# Altium PCB motherboard.PcbDoc
Units mil, origin at the board's own origin, x right, y up, seen from the top; angles counter-clockwise.
Board outline 3000 x 3500 mil, 2 copper layers (Top Layer, Bottom Layer), stack 62.8 mil thick; 55 components, 56 nets, 253 pads, 82 vias.
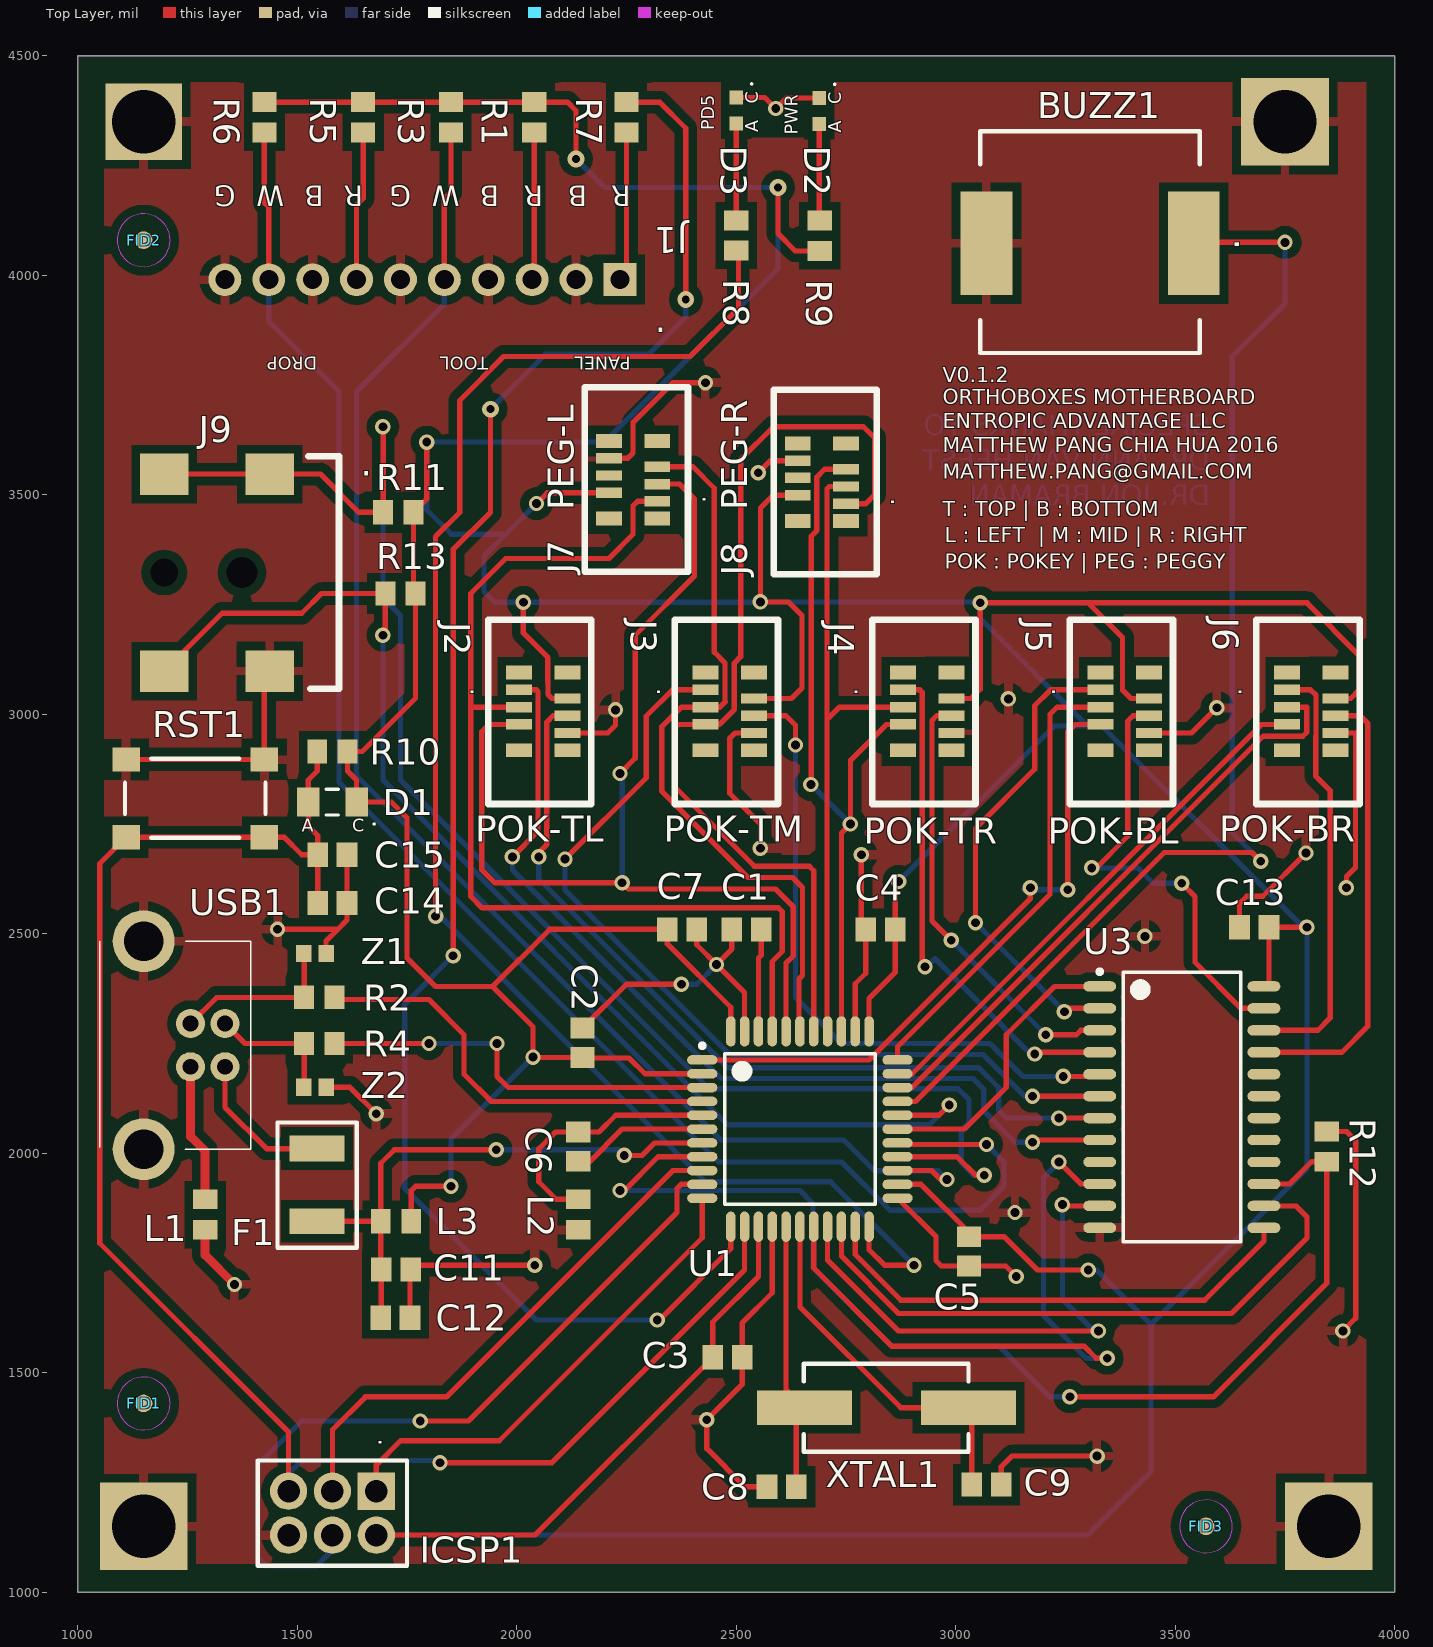
[diagram p0: Top Layer view]
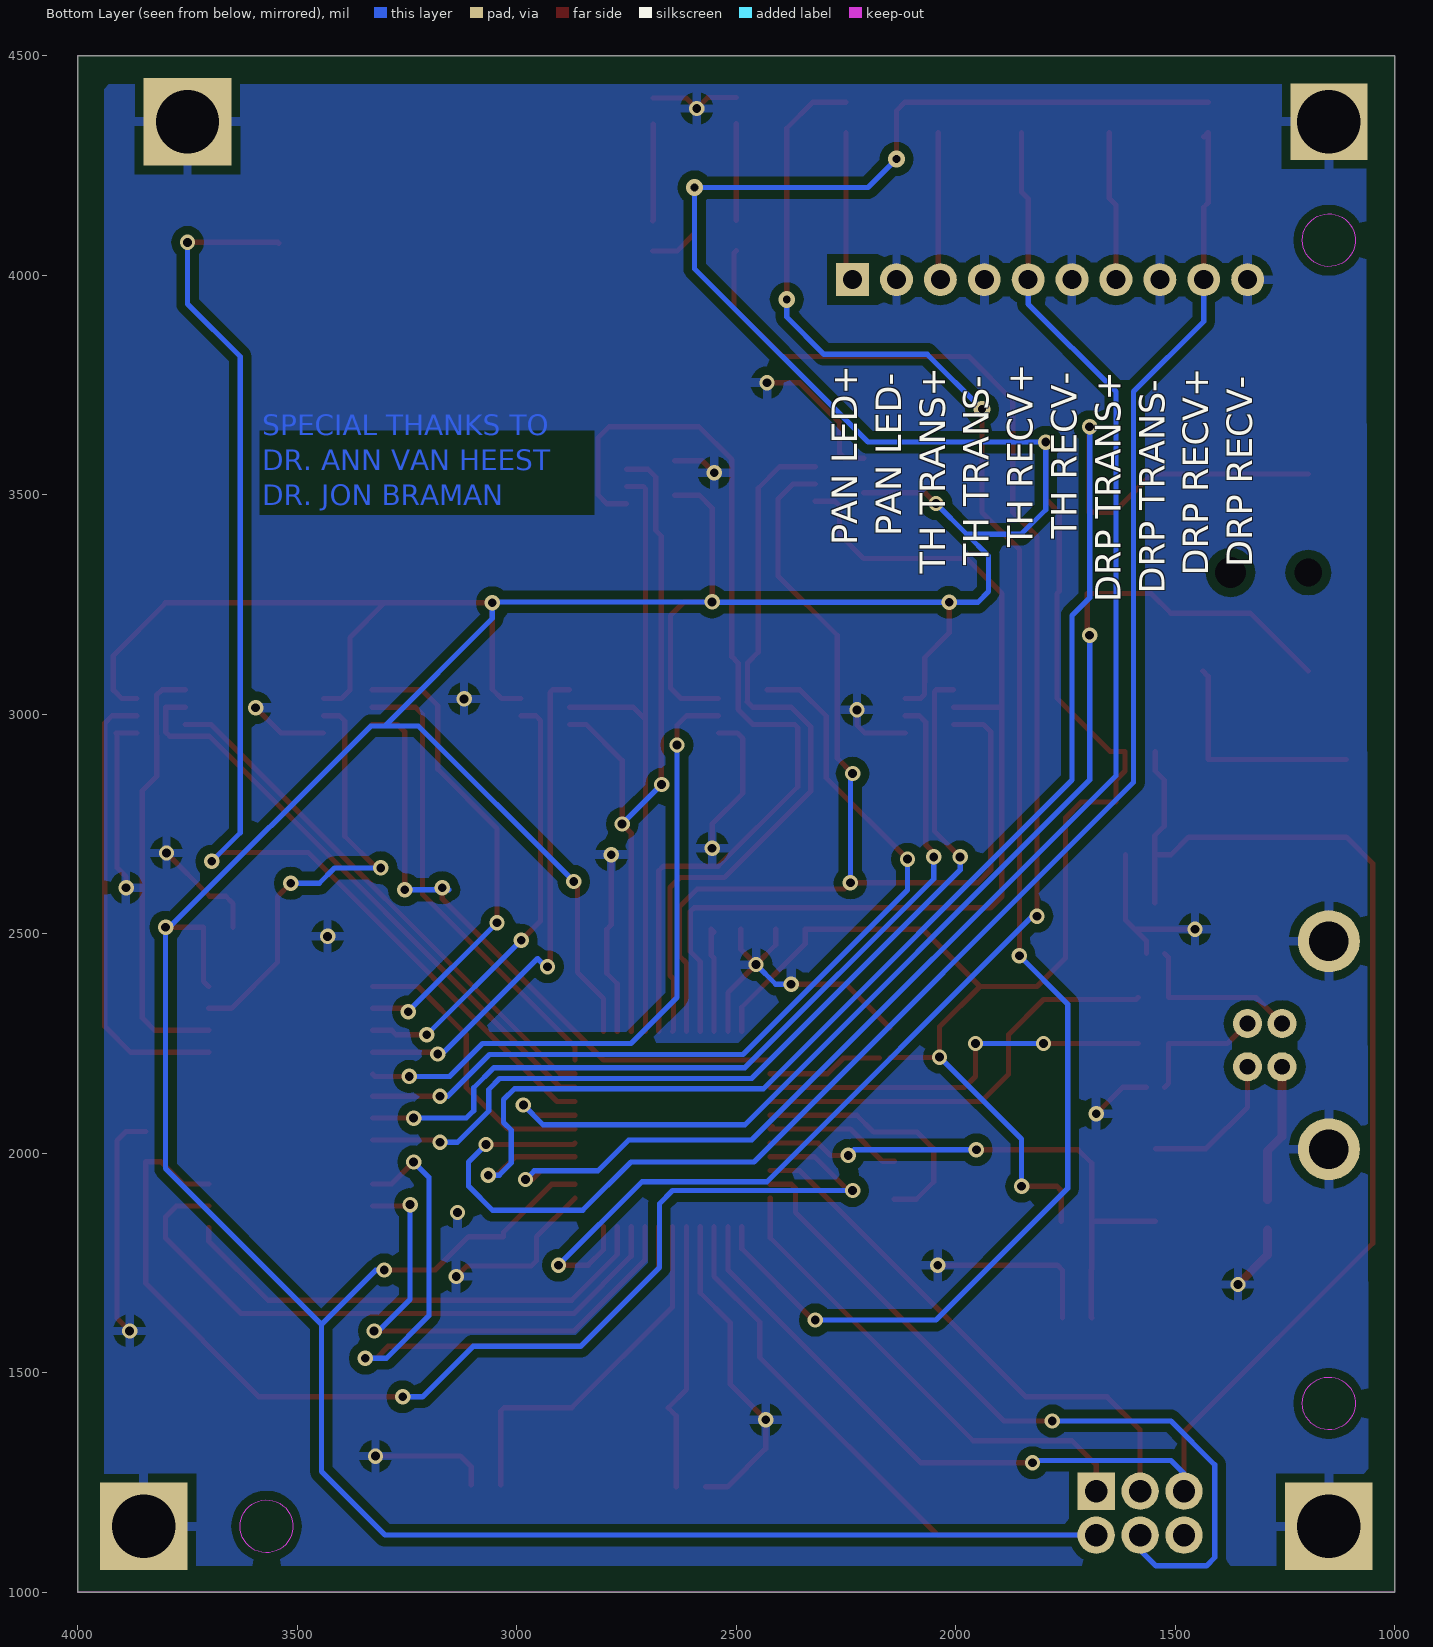
[diagram p1: Bottom Layer view, seen from below]
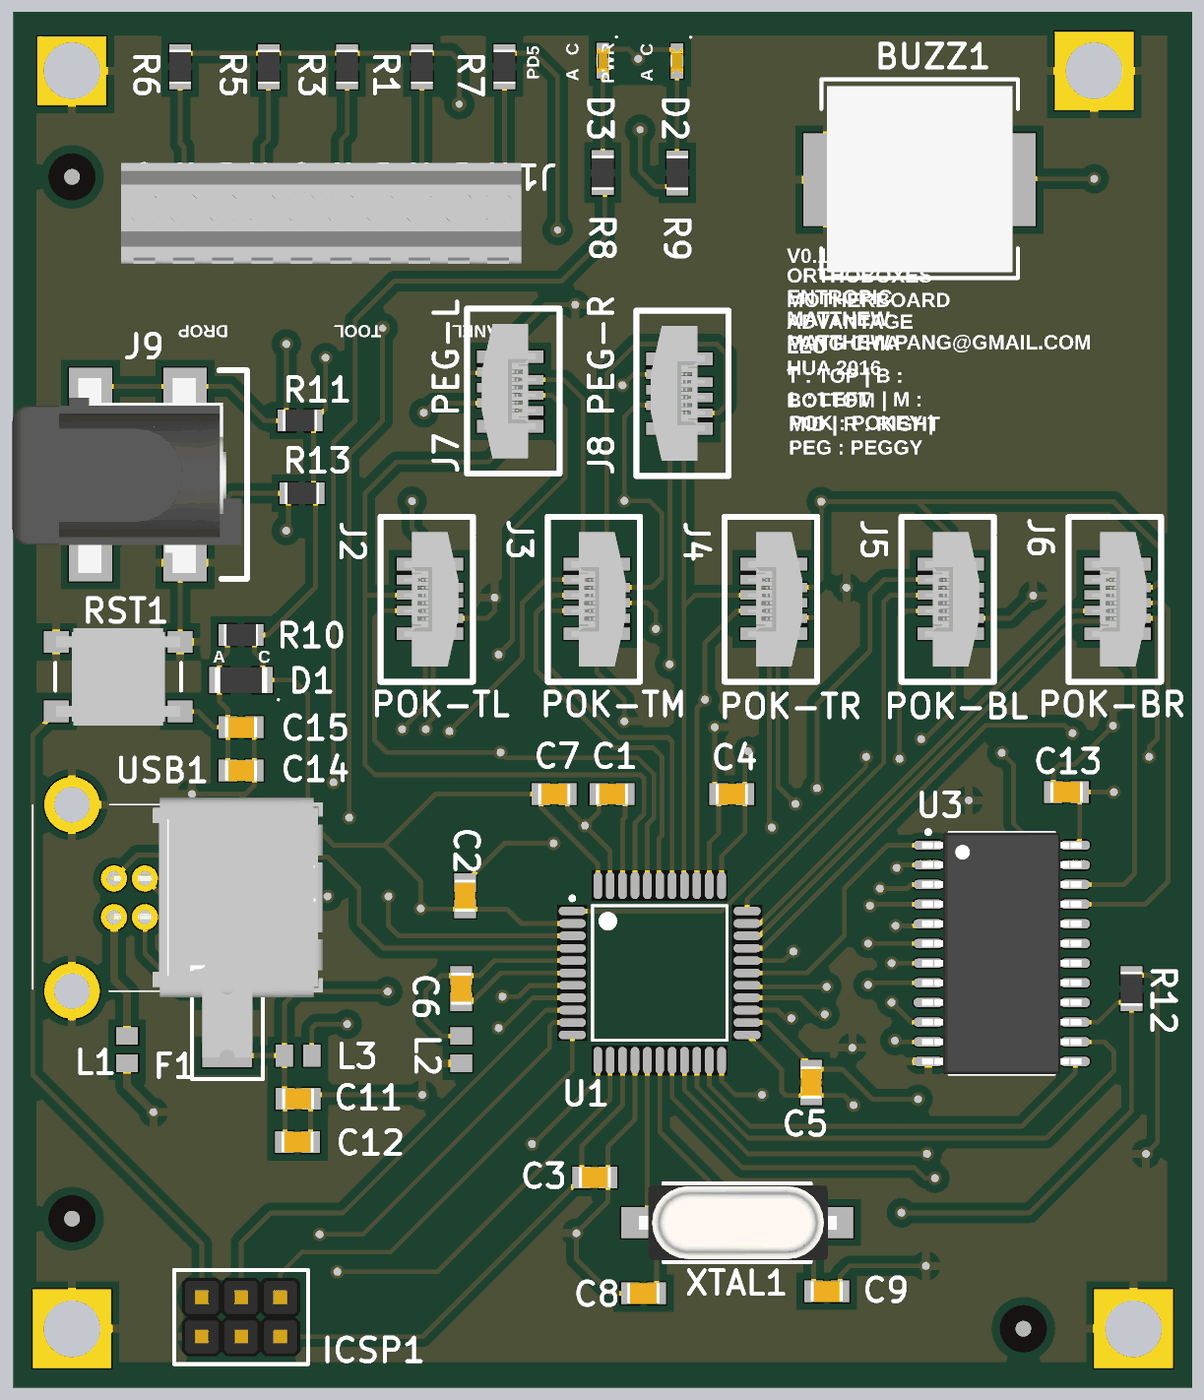
[diagram p2: 3D render of the assembled board from above, using the file's embedded part models]

## Layer stack, top to bottom
Top Solder: solder mask 1, Solder Resist, Dk 3.5
Top Layer: signal copper 1.4
Dielectric 1: dielectric 60, FR-4, Dk 4.6
Bottom Layer: signal copper 1.4
Bottom Solder: solder mask 1, Solder Resist, Dk 3.5

## Board outline
1000,1000 4000,1000 4000,4500 1000,4500

## Design rules (kind name [scope] priority, off if disabled: settings)
BoardOutlineClearance [All] p1: gap=30
Clearance [All] p1: gap=6 except(7: SMDPad-SMDPad; 8: Arc-SMDPad Track-Track Track-SMDPad; 10: SMDPad-Via THPad-Via Via-Via; 20: Arc-Poly Track-Poly SMDPad-Poly THPad-Poly Via-Poly Fill-Poly Poly-Poly)
ComponentClearance [All] p1: gap=50 collisioncheckmode=3 verticalgap=100 showdistances=TRUE
DiffPairsRouting [All] p1: maxlimit=10 minlimit=10 mostfreqgap=10 toplayer_minwidth=8 toplayer_maxwidth=15 toplayer_prefwidth=8 bottomlayer_minwidth=8 bottomlayer_maxwidth=15 bottomlayer_prefwidth=8 maxuncoupledlength=500
HoleSize [All] p1: absolutevalues=TRUE maxlimit=265 minlimit=13 maxpercent=80.000 minpercent=20.000
MinimumAnnularRing [All] p1: minimumring=7
MinimumSolderMaskSliver [All] p1: minsoldermaskwidth=4
PlaneClearance [All] p1: clearance=30
PlaneConnect [All] p1: planeconnectstyle=Relief reliefexpansion=20 reliefentries=4 reliefconductorwidth=20 reliefairgap=10
PolygonConnect [All] p1: connectstyle=Relief reliefconductorwidth=20 reliefentries=4 polygonreliefangle="90 Angle" airgapwidth=20
RoutingVias [All] p1: holewidth=18 width=38 viastyle="Through Hole" minholewidth=10 minwidth=15 maxholewidth=40 maxwidth=50
SilkToSilkClearance [All] p1: silktosilkclearance=4
SilkToSolderMaskClearance [IsPad] p1: minsilkscreentomaskgap=5 clearancetoexposedcopper=TRUE
SolderMaskExpansion [All] p1: expansion=4
Width [InNetClass('All Nets')] p1: maxlimit=30 minlimit=6 preferedwidth=6 minimp=50.000000 maximp=50.000000 favimp=50.000000
22 further rules are at their usual default settings.

## Classes and differential pairs
differential pair USBD: +USBD_P -USBD_N
differential pair USB: +USB_P -USB_N

## Components (designator, comment, footprint, x,y, rotation, side; value= is the part's Value field where it differs from the comment)
BUZZ1 "CMT-1203-SMT-TR" BUZZER 3306,4073 r270 top
C1 "100nF" CAPC2012X09N 2523.46,2510 r0 top
C2 "100nF" CAPC2012X09N 2150,2251.54 r270 top
C3 "100nF" CAPC2012X09N 2480,1535 r0 top
C4 "100nF" CAPC2012X09N 2828.46,2510 r180 top
C5 "100nF" CAPC2012X09N 3030,1776.54 r270 top
C6 "1uF" CAPC2012X14N 2140,2015 r270 top
C7 "100nF" CAPC2012X09N 2376.54,2510 r0 top
C8 "CAP 18pF" CAPC2012X08N 2603.46,1240 r0 top
C9 "CAP 18pF" CAPC2012X08N 3070,1245 r180 top
C11 "10uF" CAPC2012X14N 1725,1735 r180 top
C12 "100nF" CAPC2012X09N 1723.46,1625 r180 top
C13 "100nF" CAPC2012X09N 3680,2515 r0 top
C14 "100nF" CAPC2012X09N 1580,2570 r180 top
C15 "100nF" CAPC2012X09N 1580,2680 r180 top
D1 "Diode 100V 150mA" DIOC3215X09N 1580,2800 r0 top
D2 "PWR" 0603LED 2689,4344.94 r90 top
D3 "PD5" 0603LED 2500,4345.94 r90 top (schematic designator D1)
F1 "MF-MSMF050" "FUSE MF-MSMF050" 1545,1845 r90 top
FID1 "FIDUCIAL" FID 1150,1430 r0 top
FID2 "FIDUCIAL" FID 1150,4080 r90 top
FID3 "FIDUCIAL" FID 3570,1150 r90 top
ICSP1 "67997-206HLF" "3X2 PIN HEADER" 1680,1230 r270 top
J1 "CONN 10 POS" "CONN 10 POS" 2235,3990 r180 top
J2 "POK-TL" "FFC CONNECTOR" 2005,3055.63 r270 top
J3 "POK-TM" "FFC CONNECTOR" 2430,3055.63 r270 top
J4 "POK-TR" "FFC CONNECTOR" 2880,3055.63 r270 top
J5 "POK-BL" "FFC CONNECTOR" 3330,3055.63 r270 top
J6 "POK-BR" "FFC CONNECTOR" 3755,3055.63 r270 top
J7 "PEG-L" "FFC CONNECTOR" 2320,3485 r90 top
J8 "PEG-R" "FFC CONNECTOR" 2750.24,3479.37 r90 top
J9 "Barrel Connector" "BARREL POWER CONNECTOR" 1000,3322.8 r0 top locked
L1 "MH2029-300Y" INDC2012X11N 1290,1860 r270 top
L2 "MH2029-300Y" INDC2012X11N 2140,1860.16 r90 top
L3 "MH2029-300Y" INDC2012X11N 1725,1845 r0 top
R1 "180R" RESC2012X07N_SAMSUNG 2040,4360 r270 top
R2 "22R" RESC2012X07N 1550,2355 r0 top
R3 "1K" RESC2012X07N_SAMSUNG 1850,4360 r270 top
R4 "22R" RESC2012X07N 1550,2250 r0 top
R5 "180R" RESC2012X07N_SAMSUNG 1650,4360 r270 top
R6 "1K" RESC2012X07N_SAMSUNG 1425,4360 r270 top
R7 "100R" RESC2012X07N_SAMSUNG 2250,4360 r90 top
R8 "560R" RESC2012X07N_SAMSUNG 2500,4090.55 r270 top
R9 "560R" RESC2012X07N_SAMSUNG 2690,4090 r270 top
R10 "10k" RESC2012X07N_SAMSUNG 1580,2915 r0 top
R11 "10k" RESC2012X07N_SAMSUNG 1730,3460 r180 top
R12 "10k" RESC2012X07N_SAMSUNG 3845,2015 r90 top
R13 "10k" RESC2012X07N_SAMSUNG 1735,3275 r180 top
RST1 "DO NOT FIT - B3FS-1010P" SWITCH 1267.52,2808.58 r180 top locked
U1 "ATmega32U4-AU" 44ML_N 2645,2055 r0 top locked
U3 "74HC4067 SOIC" SOIC127P1030X265-24N 3515,2105 r0 top
USB1 "USB" "USB B RECEPTACLE" 1150,2009.1 r270 top locked
XTAL1 "9C-16.000MEEJ-T" XTAL 3029.02,1420 r180 top
Z1 "CG0603MLC" RESC1608X06N 1540,2455 r0 top
Z2 "CG0603MLC" RESC1608X06N 1540,2150 r180 top

## Footprints (in the part's own frame and the unit in brackets; to place one, negate y for a bottom-side part, rotate by r counter-clockwise, add the part's x,y. Pads: shape width x height; smd on the part's side, far side on the other; paste and mask are expansions set on the pad)
"3X2 PIN HEADER" [mil] "0.100\" Pin Header"
  rect 85x85 hole 51.18: 1(0,0)
  round 85 hole 51.18: 2(100,0) 3(0,-100) 4(100,-100) 5(0,-200) 6(100,-200)
  silkscreen extent -70,-270 170,70, body extent -50,-250 150,50, height 318
44ML_N [mm] "Thin QFP, 44-Leads, Body 10x10mm, Pitch 0.8mm, IPC Medium Density"
  oval 1.75x0.55 smd: 1(-5.65,4) 2(-5.65,3.2) 3(-5.65,2.4) 4(-5.65,1.6) 5(-5.65,0.8) 6(-5.65,0) 7(-5.65,-0.8) 8(-5.65,-1.6) 9(-5.65,-2.4) 10(-5.65,-3.2) 11(-5.65,-4) 23(5.65,-4) 24(5.65,-3.2) 25(5.65,-2.4) 26(5.65,-1.6) 27(5.65,-0.8) 28(5.65,0) 29(5.65,0.8) 30(5.65,1.6) 31(5.65,2.4) 32(5.65,3.2) 33(5.65,4)
  oval 0.55x1.75 smd: 12(-4,-5.65) 13(-3.2,-5.65) 14(-2.4,-5.65) 15(-1.6,-5.65) 16(-0.8,-5.65) 17(0,-5.65) 18(0.8,-5.65) 19(1.6,-5.65) 20(2.4,-5.65) 21(3.2,-5.65) 22(4,-5.65) 34(4,5.65) 35(3.2,5.65) 36(2.4,5.65) 37(1.6,5.65) 38(0.8,5.65) 39(0,5.65) 40(-0.8,5.65) 41(-1.6,5.65) 42(-2.4,5.65) 43(-3.2,5.65) 44(-4,5.65)
  silkscreen extent -5.77,-4.35 4.35,4.95, body extent -5,-5 5,5, height 1.2
0603LED [mm] "0603LED"
  rect 0.8x0.8 smd: 1(0,0) 2(1.5,0)
  silkscreen extent 2.24,-0.94 2.34,-0.84, body extent -0.04,-0.4 1.56,0.4, height 0.6
"BARREL POWER CONNECTOR" [mm] "PJ-002AH-SMT-TR 5.5mm OD 2.1 ID"
  rect 2.8x2.4 smd: 1(5,5.7) 1(11.1,5.7) 2(5,-5.7) 3(11.1,-5.7)
  rect 0x0 hole 1.6 unplated: H1(5,0)
  rect 0x0 hole 1.8 unplated: H2(9.5,0)
  silkscreen extent 13.33,-6.73 15.11,6.73, body extent -0.03,-6.35 14.77,6.25, height 11.2
BUZZER [mm] "CMT-1203"
  rect 6x3 smd: 1(0,6) 2(0,-6)
  silkscreen extent -6.48,-6.35 6.35,6.35, body extent -6.03,-6 5.97,6, height 3.05
CAPC2012X08N [mm] "Chip Capacitor, 2-Leads, Body 2.00x1.25mm, IPC Medium Density"
  rect 1.2x1.4 smd: 1(-0.85,0) 2(0.85,0)
  body extent -1.05,-0.67 1.05,0.67, height 0.75
CAPC2012X09N [mm] "Chip Capacitor, 2-Leads, Body 2.00x1.25mm, IPC Medium Density"
  rect 1.2x1.4 smd: 1(-0.85,0) 2(0.85,0)
  body extent -1.05,-0.67 1.05,0.67, height 0.95
CAPC2012X14N [mm] "Chip Capacitor, 2-Leads, Body 2.00x1.25mm, IPC Medium Density"
  rect 1.2x1.4 smd: 1(-0.85,0) 2(0.85,0)
  body extent -1.05,-0.67 1.05,0.67, height 1.35
"CONN 10 POS" [mm] "10 POS 0.1\" Screw Header"
  rect 1.905x1.905 hole 1.1: 1(0,0)
  round 1.905 hole 1.1: 2(2.54,0) 3(5.08,0) 4(7.62,0) 5(10.16,0) 6(12.7,0) 7(15.24,0) 8(17.78,0) 9(20.32,0) 10(22.86,0)
  body extent -1.47,-3.17 24.39,3.33, height 9.5
DIOC3215X09N [mm] "Chip Diode, 2-Leads, Body 3.20x1.50mm, IPC Medium Density"
  rect 1.3x1.7 smd: 1(-1.4,0) 2(1.4,0)
  silkscreen extent -0.35,-1.32 2.46,0.75, body extent -1.7,-0.85 1.7,0.85, height 0.95
"FFC CONNECTOR" [mm] "6POS 0.5MM"
  rect 0.6x1.5 smd: 1(0,0) 2(0.5,2.8) 3(1,0) 4(1.5,2.8) 5(2,0) 6(2.5,2.8)
  rect 0.8x1.5 smd: P1(-1,0) P2(-1,2.8) P3(3.5,2.8) P4(3.5,0)
  silkscreen extent -4.06,-1.78 6.6,4.19, body extent -3.08,-0.25 5.62,3.25, height 5.3
FID [mil] "FIDUCIAL"
  round 40 smd paste+0 mask+40: 0(0,0)
  Keep-Out Layer circle w1: c0,0 r60.21
"FUSE MF-MSMF050" [mm]
  rect 1.5x3.2 smd: 1(0,0) 2(4.2,0)
  silkscreen extent -1.52,-2.29 5.71,2.29, body extent -0.12,-1.62 4.43,1.62, height 0.7
INDC2012X11N [mm] "Chip Inductor, 2-Leads, Body 2.00x1.20mm, IPC Medium Density"
  rect 1.13x1.42 smd: 1(-0.885,0) 2(0.885,0)
  body extent -1.1,-0.7 1.1,0.7, height 1.1
RESC1608X06N [mm] "Chip Resistor, 2-Leads, Body 1.60x0.80mm, IPC Medium Density"
  rect 0.9x1 smd: 1(-0.65,0) 2(0.65,0)
  body extent -0.9,-0.5 0.9,0.5, height 0.55
RESC2012X07N [mm] "Chip Resistor, 2-Leads, Body 2.00x1.25mm, IPC Medium Density"
  rect 1.15x1.35 smd: 1(-0.875,0) 2(0.875,0)
  body extent -1.1,-0.67 1.1,0.67, height 0.7
RESC2012X07N_SAMSUNG [mm] "Chip Resistor, 2-Leads, Body 2.00x1.25mm, IPC Medium Density"
  rect 1.15x1.4 smd: 1(-0.875,0) 2(0.875,0)
  body extent -1.1,-0.7 1.1,0.7, height 0.65
SOIC127P1030X265-24N [mm] "SOIC, 24-Leads, Body 15.40x7.50mm, Pitch 1.27mm, IPC Medium Density"
  oval 1.9x0.6 smd: 1(-4.75,6.985) 2(-4.75,5.715) 3(-4.75,4.445) 4(-4.75,3.175) 5(-4.75,1.905) 6(-4.75,0.635) 7(-4.75,-0.635) 8(-4.75,-1.905) 9(-4.75,-3.175) 10(-4.75,-4.445) 11(-4.75,-5.715) 12(-4.75,-6.985) 13(4.75,-6.985) 14(4.75,-5.715) 15(4.75,-4.445) 16(4.75,-3.175) 17(4.75,-1.905) 18(4.75,-0.635) 19(4.75,0.635) 20(4.75,1.905) 21(4.75,3.175) 22(4.75,4.445) 23(4.75,5.715) 24(4.75,6.985)
  silkscreen extent -4.87,-7.8 3.4,7.96, body extent -5.15,-7.8 5.15,7.8, height 2.65
SWITCH [mm] "SWITCH"
  rect 1.6x1.4 smd: 1(4,-2.25) 2(-4,-2.25) 3(4,2.25) 4(-4,2.25)
  silkscreen extent -4.06,-2.29 4.06,2.29, body extent -4,-3.15 4,3.15, height 4.3
"USB B RECEPTACLE" [mm] "Amphenol 61729-1011BLF"
  round 1.682 hole 0.92: +5VBus(-4.77,4.71) USBDM(-7.27,4.71) USBDP(-7.27,2.71) USBGND(-4.77,2.71)
  round 3.581 hole 2.3: SHL_GND1(-12.04,0) SHL_GND2(0,0)
  silkscreen extent -12.04,-2.54 0,6.19, body extent -12.61,-10.13 0.51,5.81, height 11
XTAL [mm]
  rect 5.5x2 smd: 1(0,0) 2(9.5,0)
  silkscreen extent 0,-2.54 9.53,2.54, body extent -1.7,-2.41 11.1,2.42, height 4.3

## Part data
BUZZ1: "BUZZER PIEZO 5V 12MM SMD"
C1 C2 C3 C4 C5 C7 C12 C13 C14 C15: library part CL21F104ZBCNNNC, "CAP CER 0.1UF 50V Y5V 0805"
C6: library part CL21A105KBCLNNC, "CAP CER 1UF 50V X5R 0805"
C8 C9: library part CL21C180JBANNNC, "CAP CER 18PF 50V NP0 0805"
C11: library part CL21A106KAYNNNE, "CAP CER 10UF 25V X5R 0805"
D1: library part CD1206-S01575, "DIODE GEN PURP 100V 150MA 1206"
D2: library part "LG L29K-F2J1-24", "LED GREEN DIFFUSED 0603 SMD"
D3: library part "LS L29K-H1J2-1-Z", "LED RED DIFFUSED 0603 SMD"
F1: library part MF-MSMF050-2, "PTC RESETTABLE .50A 15V 1812"
FID1 FID2 FID3: library part "Fiducial 1"
ICSP1: "CONN HEADER 6POS .100 STR 15AU"
J1: library part 1-282834-0, "TERM BLOCK 10POS SIDE ENT 2.54MM"
J2 J3 J4 J5 J6 J7 J8: library part 0525590652, "CONN FFC VERT 6POS 0.50MM SMD"
J9: library part PJ-002AH-SMT-TR, "CONN POWER JACK 2.1X5.5MM HI CUR"
L1 L2 L3: "EMI Filter Beads, Chips & Arrays Impedance 30ohms IDC 3.0"
R1 R5: library part RC2012F181CS, "RES SMD 180 OHM 1% 1/8W 0805"
R2 R4: library part ERJ-6ENF22R0V, "RES SMD 22 OHM 1% 1/8W 0805"
R3 R6: library part RC2012F102CS, "RES SMD 1K OHM 1% 1/8W 0805"
R7: library part RC2012F101CS, "RES SMD 100 OHM 1% 1/8W 0805"
R8 R9: library part RC2012F561CS, "RES SMD 560 OHM 1% 1/8W 0805"
R10 R11 R12 R13: library part RC2012F103CS, "RES SMD 10K OHM 1% 1/8W 0805"
RST1: library part B3FS-1010P, "SWITCH TACTILE SPST-NO 0.05A 24V"
U1: library part CMP-0095-00285-2, "8-bit AVR Microcontroller, 2.7-5.5V, 16MHz, 32KB Flash, 1KB EEPROM, 2.5KB SRAM, USB Controller, 44-pin TQFP, Industrial Grade (-40°C to 85°C), Ext Osc"
U3: library part CD74HC4067M96, "IC MUX/DEMUX 1X16 24SOIC"
USB1: library part 61729-1011BLF, "USB RCPT B-TYPE R/A FULL BACK"
XTAL1: "CRYSTAL 16.0000MHZ 18PF SMD"
Z1 Z2: library part CG0603MLC-05E, "VARISTOR 0603"

## Free pads (board coordinates)
  rect 200x200 hole 144: GND(1150,1150) GND(3750,4350) GND(3850,1150)
  rect 175x175 hole 144: GND(1150,4350)

## Via types
v1: diameter 35, hole 20, Top Layer to Bottom Layer, tented both sides, 78 vias
v2: diameter 38, hole 18, Top Layer to Bottom Layer, tented both sides, 4 vias

## Nets (pads, with @x,y where several pads share a name; then routed paths per layer and width w, separated by ;. In a path a pad name is that pad's centre, name@x,y a point inside that pad or via, vN(x,y) a via of type N, cw(c..) or ccw(c..) an arc to the next point about the centre after c; other vN are vias at no path point)
+5V: C2.2 C3.1 C4.1 C5.1 C7.1 C13.2 D1.2 ICSP1.2 J2.2 J3.2 J4.2 J5.2 J6.2 J7.2 J8.2 L3.2 R1.1 R3.1 R5.1 R6.1 R9.2 R10.2 R11.1 R13.1 U1.2 U1.14 U1.24 U1.34 U1.44 U3.24 | length 18104.3
  Top Layer w12: R6.1 R5.1 R3.1 R1.1 2115.55,4394.45 2135,4375 v2(2135,4265) ; ICSP1.2 2041.54,1130 C3.1 2446.54,1615.32 2550.51,1719.3 U1.14 ; L3.2 1759.84,1914.84 1770,1925 v1(1850,1925) ; v1(1795,3620) 1795,3490.55 R11.1 1764.45,3280 R13.1 1769.45,3036.45 1648,2915 R10.2 1614.45,2870.55 1635.12,2849.88 D1.2 1714,2800 1750,2764 1750,2445 1815,2380 1945,2380 ; v1(2015,3255) 2015,3185 2070.71,3129.29 2070.71,3072.75 2071,3072.46 2071,3044.94 2080,3035.94 J2.2 ; v1(2037,2219) 2037,2288 1945,2380 ; v1(2045,3480) 2069.68,3504.68 J7.2 ; v1@2048.07,2218.07 C2.2 ; C2.2@2174,2217 2256,2217 2292.02,2180.98 U1.2 ; U1.44 2487.52,2332.48 2343.07,2476.93 C7.1 2075,2510 1945,2380 ; J3.2 2625.94,3035.94 2650,3060 2650,3225 2619.06,3255.94 v1(2555,3255.94) 2555,3470 2584.06,3499.06 J8.2 ; v2(2595,4200) 2595,4095 2634.45,4055.55 R9.2 ; U1.34 2802.48,2352.48 2861.93,2411.93 C4.1 2861.93,2610.93 v1(2870,2619) ; U1.24 2920.98,1929.02 3030,1820 C5.1 3110,1810 3186,1734 v1(3302,1734) ; J4.2 3035,3035.94 3055.94,3056.89 v1(3055.94,3254.06) 3300.94,3254.06 ; J5.2 3399.06,3035.94 3380,3055 3380,3175 3300.94,3254.06 ; U3.24 3713.46,2391.46 C13.2 v1(3800,2515) ; J6.2 3900,3035.94 3919.06,3055 3919.06,3134.06 3800.94,3252.17 3800.94,3254.06 3300.94,3254.06
  Bottom Layer w12: ICSP1.2 3300,1130 3445,1275 3445,1610 ; v1(1850,1925) 1850,2032 v1(2037,2219) ; v1(2045,3480) 1975,3410 ; v2(2135,4265) 2200,4200 v2(2595,4200) 2595,4015 2200,3620 v1(1795,3620) 1795,3466 1851,3410 1975,3410 ; v1(2870,2619) 3224.5,2973.5 3300.5,2973.5 ; v1(3302,1734) 3321,1734 3445,1610 ; 1975,3410 1925.5,3360.5 1925.5,3279.5 1950,3255 v1(2015,3255) 2554.06,3255 v1(2555,3255.94) 3054.06,3255.94 v1(3055.94,3254.06) 3055.94,3218.06 3300.5,2973.5 ; 3300.5,2973.5 3332.5,2973.5 3791,2515 v1(3800,2515) 3800,1965 3445,1610
GND: BUZZ1.2 C1.1 C2.1 C3.2 C4.2 C5.2 C7.2 C8.1 C9.1 C11.1 C12.1 C13.1 C14.1 C15.1 D2.2 D3.2 ICSP1.6 J1.2 J1.4 J1.6 J1.8 J1.10 J2.6 J3.6 J4.6 J5.6 J6.6 J7.6 J8.6 J9.3 L1.2 L2.1 pad.GND R12.2 RST1.1 RST1.2 U1.15 U1.23 U1.35 U1.43 U3.12 USB1.SHL_GND1 USB1.SHL_GND2 Z1.2 Z2.1 | length 6715.1
  Top Layer w12: RST1.1 RST1.2 1425,3086.38 J9.3 ; USB1.SHL_GND1 USB1.SHL_GND1@1176.88,2510 ; pad.GND@1150,4350 pad.GND@1185,4315 ; v1(1455,2510) 1592,2510 ; Z2.1 1620,2150 v1(1680,2090) ; Z1.2 1565.59,2483.59 1592,2510 ; C15.1 C14.1 1613.46,2531.46 1592,2510 ; C12.1 1756.93,1733.46 C11.1 1768.46,1745 v1(2041,1745) ; J2.6 2207.2,2957.2 2225,2975 v1(2225,3010) ; C2.1 2250,2385 v1(2375,2385) ; J7.6 2253.43,3583.43 2265,3595 2265,3665 2355,3755 v1(2430,3755) ; C7.2 2410,2475 v1(2455,2430) ; C1.1 2490,2465 v1(2455,2430) ; D3.2 2565,4405 v1(2590,4380) 2614,4404 D2.2 ; U1.43 2519.02,2365.98 v1(2455,2430) ; J3.6 2497.2,2957.2 2485,2945 2485,2820 2555,2750 v1(2555,2695) ; v1(2550,3550) 2577.8,3577.8 J8.6 ; C8.1 2520,1240 2433,1327 v1(2433,1393) 2513.46,1473.46 C3.2 2513.46,1613.46 2582.01,1682.01 U1.15 ; U1.35 2770.98,2385.98 2795,2410 C4.2 2785,2520 v1(2785,2680) ; U1.23 2955,1809.96 2955,1755 2966.93,1743.07 C5.2 3113.93,1743.07 v1(3138,1719) ; C9.1 3103.46,1285.46 3128,1310 v1(3322,1310) ; J5.6 3537.2,2957.2 v1(3595,3015) ; C13.1 3646.54,2569 3663.07,2585.54 3699.54,2585.54 v1(3798,2684) ; R12.2 3890.55,2049.45 3911,2029 3911,1624 v1(3882,1595) ; J6.6 3912.8,2957.2 3910.59,2955 3910.59,2650.59 3890,2630 v1(3890,2605)
  Top Layer w20: L1.2 1290,1768 v1(1357,1701)
  Bottom Layer w12: v1(2375,2385) 2410,2385 v1(2455,2430)
  other v1: 3135,1865 3431,2494 3120,3035
NetBUZZ1_1: BUZZ1.1 U1.30 | length 2765.9
  Top Layer w12: U1.30 2907.99,2117.99 3475,2685 3675,2685 v1(3695,2665) ; BUZZ1.1 3544.22,4075 v1(3750,4075)
  Bottom Layer w12: v1(3695,2665) 3630,2730 3630,3815 3750,3935 v1(3750,4075)
NetC1_2: C1.2 U1.42 | length 244.3
  Top Layer w12: U1.42 2550.51,2444.58 2556.93,2451 C1.2 C1.2@2550.51,2503.58
NetC6_1: C6.1 L2.2 U1.5 | length 585.8
  Top Layer w12: L2.2 2090,1895 2050,1935 2050,2010 2088.46,2048.46 C6.1 2187.46,2048.46 2225.5,2086.5 U1.5
NetC6_2: C6.2 U1.6 | length 320.1
  Top Layer w12: C6.2 2166.54,1981.54 2240,2055 U1.6 U1.6@2417.56,2060
NetC8_2: C8.2 U1.16 XTAL1.2 | length 617.2
  Top Layer w12: U1.16 2613.5,1461.5 XTAL1.2 2636.93,1401.93 C8.2
NetC9_2: C9.2 U1.17 XTAL1.1 | length 840
  Top Layer w12: U1.17 2645,1650 2875,1420 XTAL1.1 3036.54,1412.48 C9.2
NetC14_2: C14.2 C15.2 D1.1 ICSP1.5 R10.1 RST1.3 RST1.4 U1.13 | length 3882.5
  Top Layer w12: ICSP1.5 1480,1365 1050,1795 1050,2659.96 RST1.3 RST1.4 1470,2720 1510,2680 C15.2 ; R10.1 1545.55,2870.55 1524.88,2849.88 D1.1 1524.88,2745.12 1546.54,2723.46 C15.2 ; C14.2 C15.2 ; v1(1825,1295) 2080,1295 2519.02,1734.02 U1.13
  Bottom Layer w12: ICSP1.5 1480,1270 1510,1300 1820,1300 v1(1825,1295)
NetD2_1: D2.1 R9.1 | length 220.9
  Top Layer w12: D2.1 2689,4125.45 R9.1
NetD3_1: D3.1 R8.1 | length 220.9
  Top Layer w12: R8.1 D3.1
NetF1_2: F1.2 USB1.+5VBus | length 340.9
  Top Layer w12: USB1.+5VBus 1335.43,2104.57 1429.65,2010.35 F1.2
NetICSP1_1: ICSP1.1 U1.11 | length 1106.9
  Top Layer w12: ICSP1.1 1680,1290 1735,1345 1960,1345 2422.56,1807.56 U1.11
NetICSP1_3: ICSP1.3 U1.9 | length 1227.2
  Top Layer w12: ICSP1.3 1580,1370 1655,1445 1840,1445 2355.51,1960.51 U1.9
NetICSP1_4: ICSP1.4 U1.10 | length 1774.4
  Top Layer w12: ICSP1.4 ICSP1.4@1580,1157.17 ; v1(1780,1390) 1890,1390 2365,1865 2365,1920 2374.02,1929.02 U1.10
  Bottom Layer w12: ICSP1.4 1580,1096 1544,1060 1429,1060 1410,1079 1410,1290 1510,1390 v1(1780,1390)
NetJ1_1: J1.1 R7.1 | length 341.8
  Top Layer w12: J1.1 2250,4005 R7.1
NetJ1_3: J1.3 R1.2 | length 337.6
  Top Layer w12: J1.3 2040,3995 R1.2
NetJ1_5: J1.5 R3.2 U1.25 | length 3401.7
  Top Layer w12: J1.5 1835,4175 1850,4190 R3.2 ; U1.25 2944.49,1960.51 2965,1940 v1(2980,1940)
  Bottom Layer w12: J1.5 1835,3935 1635,3735 1635,2860 2465,2030 2745,2030 2815,1960 2960,1960 v1(2980,1940)
NetJ1_7: J1.7 R5.2 | length 341.8
  Top Layer w12: J1.7 1635,4160 1650,4175 R5.2
NetJ1_9: J1.9 R6.2 U1.27 | length 3822.3
  Top Layer w12: J1.9 1435,4155 1425,4165 R6.2 R6.2@1435,4315.55 ; U1.27 2870.95,2020 v1(3070,2020)
  Bottom Layer w12: J1.9 1435,3895 1595,3735 1595,2845 2460,1980 2740,1980 2850,1870 3055,1870 3110,1925 3110,1980 v1(3070,2020)
NetJ2_1: J2.1 U3.8 | length 2101.5
  Top Layer w12: v1(1990,2675) 2048.53,2733.53 2048.53,3051.47 2044.37,3055.63 J2.1 ; v1(3175,2025) 3180,2030 U3.8
  Bottom Layer w12: v1(1990,2675) 1990,2645 2465,2170 3039,2170 3064,2145 3064,2096 3135,2025 v1(3175,2025)
NetJ2_3: J2.3 J7.1 U1.41 | length 2357.2
  Top Layer w12: J2.3 1896.26,3016.26 1895,3015 ; J7.1 2275,3485 2265,3475 2265,3410 2210,3355 1975,3355 1895,3275 1895,3015 ; U1.41 2582.01,2437.01 2605,2460 2605,2550 2596,2559 1921,2559 1895,2585 1895,3015
NetJ2_4: J2.4 U3.7 | length 1951.9
  Top Layer w12: v1(2050,2675) 2050,2685 2068.53,2703.53 2068.53,2982.53 2082.57,2996.57 J2.4 ; v1(3235,2080) U3.7
  Bottom Layer w12: v1(2050,2675) 2050,2625 2480,2195 3052,2195 3098,2149 3098,2097 3115,2080 v1(3235,2080)
NetJ2_5: J2.5 J7.3 U1.40 | length 2487.3
  Top Layer w12: J2.5 1936.89,2976.89 1920,2960 1920,2646 1950,2616 v1(2240,2616) 2254,2602 2589,2602 2630,2561 2630,2450 2613.5,2433.5 U1.40 ; v1(2235,2865) 2270,2900 2270,3180 2405,3315 2405,3490 2370.63,3524.37 J7.3
  Bottom Layer w12: v1(2235,2865) 2240,2860 v1(2240,2616)
NetJ3_1: J3.1 U3.6 | length 2044.8
  Top Layer w12: v1(2110,2670) 2295,2855 2295,2995.63 2355,3055.63 J3.1 ; v1(3175,2130) U3.6
  Bottom Layer w12: v1(2110,2670) 2110,2600 2485,2225 3062,2225 3157,2130 v1(3175,2130)
NetJ3_3: J3.3 J7.5 U1.39 | length 1705.7
  Top Layer w12: J7.5 2401.26,3563.74 2450,3515 2450,3141.49 2474.53,3116.96 2474.53,3028.15 2474.71,3027.97 2463,3016.26 J3.3 2375,3016.26 2330,2971.26 2330,2825 2527,2628 2628,2628 2651,2605 2651,2405 2643,2397 2643,2279.44 U1.39
NetJ3_4: J3.4 U3.5 | length 1493.3
  Top Layer w12: J3.4 2613.43,2996.57 2635,2975 v1(2635,2930) ; v1(3245,2175) 3322.99,2175 U3.5
  Bottom Layer w12: v1(2635,2930) 2635,2355 2740,2250 3078,2250 3153,2175 v1(3245,2175)
NetJ3_5: J3.5 J8.1 U1.38 | length 2174.4
  Top Layer w12: U1.38 2676.5,2643.5 2666,2654 2541,2654 2360,2835 2360,2970 2366.89,2976.89 J3.5 2461.89,2976.89 2495.71,3010.71 2495.71,3116.96 2510,3131.25 2510,3580 2585,3655 2790,3655 2815,3630 2815,3500 2794.37,3479.37 J8.1
NetJ4_1: J4.1 U3.4 | length 1176.7
  Top Layer w12: J4.1 2918,3055.63 2924,3049.63 2924,2431 v1(2930,2425) ; v1(3180,2226) 3184,2230 U3.4
  Bottom Layer w12: v1(2930,2425) 2930,2421 2952.5,2443.5 3170,2226 v1(3180,2226)
NetJ4_3: J4.3 J8.3 U1.37 | length 1467.4
  Top Layer w12: U1.37 2706.71,2278.72 2706.71,2988 ; J8.3 2711.74,3518.74 2706.71,3513.71 2706.71,2988 ; J4.3 2734.97,3016.26 2706.71,2988
NetJ4_4: J4.4 U3.3 | length 999
  Top Layer w12: v1(2990,2485) 2946,2529 2946,2986 2956.57,2996.57 J4.4 ; v1(3205,2270) 3275,2270 3285,2280 U3.3
  Bottom Layer w12: v1(2990,2485) v1(3205,2270)
NetJ4_5: J4.5 J8.5 U1.36 | length 1687.4
  Top Layer w12: v1(2670,2840) 2671,2841 2671,3405.93 2683.53,3418.45 2683.53,3540.53 2701.11,3558.11 J8.5 ; U1.36 2739.49,2729.49 v1(2760,2750) 2760,2895 2841.89,2976.89 J4.5
  Bottom Layer w12: v1(2670,2840) v1(2760,2750)
NetJ5_1: J5.1 U3.2 | length 1085.7
  Top Layer w12: v1(3045,2525) 3045,2740 3180,2875 3180,3020 3215.63,3055.63 J5.1 ; v1(3247.5,2322.5) 3255,2330 U3.2
  Bottom Layer w12: v1(3045,2525) v1(3247.5,2322.5)
NetJ5_3: J5.3 U1.33 | length 1053.2
  Top Layer w12: U1.33 2867.44,2242.44 3215,2590 3215,3000 3231.26,3016.26 J5.3
NetJ5_4: J5.4 U3.23 | length 1040
  Top Layer w12: v1(3310,2650) 3320,2650 3392,2722 3392,2984.57 3404,2996.57 J5.4 ; v1(3515,2615) 3545,2585 3545,2435 3650,2330 U3.23
  Bottom Layer w12: v1(3310,2650) 3415,2650 3450,2615 v1(3515,2615)
NetJ5_5: J5.5 U1.1 | length 1483.7
  Top Layer w12: U1.1 2802.48,2212.48 3170,2580 v1(3170,2605) ; v1(3255,2600) 3255,2960 3271.89,2976.89 J5.5
  Bottom Layer w12: v1(3170,2605) 3160,2605 3155,2600 v1(3255,2600)
NetJ6_1: J6.1 U3.22 | length 982.5
  Top Layer w12: U3.22 3825,2280 3853,2308 3853,2826 3820,2859 3820,2949.64 3820.53,2950.17 3820.53,3043.47 3808.37,3055.63 J6.1
NetJ6_3: J6.3 U1.31 | length 1389.4
  Top Layer w12: U1.31@2887.61,2149.49 U1.31 2867.95,2150 2900,2150 3700,2950 3790.66,2950 3799.53,2958.87 3799.53,3016.26 J6.3
NetJ6_4: J6.4 U3.21 | length 1032.2
  Top Layer w12: U3.21 3880,2230 3938.43,2288.43 3938.43,2980 3921.85,2996.57 J6.4
NetJ6_5: J6.5 U1.32 | length 1217.2
  Top Layer w12: U1.32 2900.98,2180.98 3696.89,2976.89 J6.5
NetJ9_1: J9.1 R11.2 U1.26 | length 3578.8
  Top Layer w12: J9.1@1196.85,3547.21 1437.01,3547.21 1552.79,3547.21 1640,3460 R11.2 1695.55,3654.45 v1(1695,3655) ; U1.26 3002.99,1992.01 3045,1950 v1(3065,1950)
  Bottom Layer w12: v1(1695,3655) 1695,3265 1735,3225 1735,2850 2438,2147 3005,2147 3030,2122 3030,2070 3012.5,2052.5 3012.5,1977.5 3040,1950 v1(3065,1950)
NetJ9_2: J9.2 R13.2 U1.29 | length 2765.2
  Top Layer w12: J9.2 1328.46,3230 1510,3230 1555,3275 R13.2 1700.55,3185.55 v1(1695,3180) ; U1.29 2961.5,2086.5 v1(2985,2110)
  Bottom Layer w12: v1(1695,3180) 1695,2850 2480,2065 2940,2065 v1(2985,2110)
NetL1_1: L1.1 USB1.USBGND | length 315.8
  Top Layer w20: USB1.USBGND 1256.69,2038.31 1290,2005 L1.1
NetR7_2: R7.2 U1.12 | length 3961.5
  Top Layer w12: v1(1855,2450) 1855,3375 1940,3460 v2(1940,3695) ; R7.2 2325.55,4394.45 2385,4335 v2(2385,3945) ; v1(2320,1620) 2325,1620 2487.52,1782.52 U1.12
  Bottom Layer w12: v1(1855,2450) 1745,2340 1745,1920 2045,1620 v1(2320,1620) ; v2(1940,3695) 2065,3820 2300,3820 2385,3905 v2(2385,3945)
NetR8_2: R8.2 U1.22 | length 3641.8
  Top Layer w12: v1(1815,2540) 1815,3405 1870,3460 1870,3715 1970,3815 2395,3815 2505,3925 2505,4051.1 R8.2 ; U1.22 2802.48,1780 2837.48,1745 v1(2905,1745)
  Bottom Layer w12: v1(1815,2540) 1825,2540 2430,1935 2715,1935 v1(2905,1745)
NetR12_1: R12.1 U1.8 U3.15 | length 2657.4
  Top Layer w12: v1(2235,1915) 2245,1915 2322.01,1992.01 U1.8 ; v1(3260,1445) 3587,1445 3845,1703 R12.1 3810.55,1980.55 3760,1930 U3.15
  Bottom Layer w12: v1(2235,1915) 2645,1915 2675,1885 2675,1740 2855,1560 3100,1560 3215,1445 v1(3260,1445)
NetU1_18: U1.18 U3.10 | length 1511.1
  Top Layer w12: U1.18 2676.5,1738.5 2855,1560 3293,1560 3320,1533 v1(3345,1533) ; v1(3235,1980) 3285,1930 U3.10
  Bottom Layer w12: v1(3235,1980) 3200,1945 3200,1630 3297,1533 v1(3345,1533)
NetU1_19: U1.19 U3.11 | length 1185.2
  Top Layer w12: U1.19 2707.99,1757.01 2870,1595 v1(3325,1595) ; v1@3235,1880 3240,1885 3242,1883 v1(3243,1883) 3243,1882 3245,1880 U3.11
  Bottom Layer w12: v1(3243,1883) 3243,1667 3315,1595 v1(3325,1595)
NetU1_20: U1.20 U3.14 | length 1409.8
  Top Layer w12: U1.20 2739.49,1765.51 2870,1635 3628,1635 3800,1807 3800,1855 3776,1879 3776,1880 U3.14
NetU1_21: U1.21 U3.13 | length 1123.6
  Top Layer w12: U1.21 2770.98,1769.02 2875,1665 3567,1665 3702.01,1800.01 U3.13
NetU1_28: U1.28 U3.1 | length 665.5
  Top Layer w12: U1.28 3020,2055 3115,2150 3115,2270 3225,2380 U3.1
USB_N: R4.1 USB1.USBDM Z2.2 | length 302.6
  Top Layer w12: USB1.USBDM 1380.75,2250 R4.1 1515.55,2158.86 Z2.2@1524.41,2150
USB_P: R2.1 USB1.USBDP Z1.1 | length 387.2
  Top Layer w12: USB1.USBDP 1316.37,2355 R2.1 1515.55,2446.14 Z1.1@1524.41,2455
USBD_N: R4.2 U1.3 | length 923.7
  Top Layer w12: R4.2 v1(1800,2250) ; v1(1955,2250) 1955,2175 1980.51,2149.49 U1.3
  Bottom Layer w12: v1(1800,2250) v1(1955,2250)
USBD_P: R2.2 U1.4 | length 989
  Top Layer w12: R2.2 1589.45,2350 1800,2350 1880,2270 1880,2180 1942.01,2117.99 U1.4
VUSB: C11.2 C12.2 F1.1 L3.1 U1.7 | length 1260.8
  Top Layer w12: F1.1 L3.1 ; C12.2 1691.54,1626.54 C11.2 1690.16,1736.38 L3.1 ; v1(1953,2008) 1721.16,2008 1690.16,1977 L3.1 ; v1(2245,1995) 2285,1995 2313.5,2023.5 U1.7
  Bottom Layer w12: v1(1953,2008) 2232,2008 v1(2245,1995)
pads on no net: FID1.0 FID2.0 FID3.0 J2.P1 J2.P2 J2.P3 J2.P4 J3.P1 J3.P2 J3.P3 J3.P4 J4.P1 J4.P2 J4.P3 J4.P4 J5.P1 J5.P2 J5.P3 J5.P4 J6.P1 J6.P2 J6.P3 J6.P4 J7.4 J7.P1 J7.P2 J7.P3 J7.P4 J8.4 J8.P1 J8.P2 J8.P3 J8.P4 J9.H1 J9.H2 U3.9 U3.16 U3.17 U3.18 U3.19 U3.20

## Polygon pours and split planes (outlines as drawn)
GND on Top Layer "GND" (solid, remove dead copper, pour order 0): 1060,4440 3935,4440 3935,1065 1060,1065
GND on Bottom Layer "GND" (solid, remove dead copper, pour order 2): 1065,4435 3930,4435 3935,4440 3940,4435 3940,1060 1060,1060

## Keep-outs
Keep-Out Layer:
  the board outline again, w1

## Other copper
Top Layer:
  pour cut-out: 2379,2253 2907,2253 2912,2248 2912,1789 2388,1789 2378,1789
  pour cut-out: 2468,4431 2716,4431 2716,4314 2715,4313 2468,4313
  pour cut-out: 2492,1640 2489,1637 2489,1469 2600,1469 2602,1471 2602,1645 2495,1645 2492,1642
  pour cut-out: 1949,2523 1949,2169 1955,2175 2474,2175 2474,2519 2476,2521
  pour cut-out: 3602.91,2562.56 3757.09,2562.56 3757.09,2467.91 3757.56,2467.44 3602.91,2467.44
  pour cut-out: 1515,2870 1727,2870 1771,2826 1771,2358 1526,2358 1509,2375
  pour cut-out: 1476.69,2189.68 1603.31,2189.68 1603.31,2110.32 1476.69,2110.32
  pour cut-out: 1647,1771 1800.27,1771 1800.55,1771.28 1800.55,1577.44 1646.38,1577.44
  pour cut-out: 2526.38,1287.56 2680.55,1287.56 2680.55,1192.44 2526.38,1192.44
  pour cut-out: 2992.91,1292.56 3144.86,1292.56 3147.09,1290.33 3147.09,1197.44 2992.91,1197.44
  pour cut-out: 3797.44,2092.09 3892.56,2092.09 3892.56,1959.56 3882,1949 3799,1949
  pour cut-out: 1242.05,1937.09 1337.95,1937.09 1337.95,1786 1245.13,1786 1242.05,1782.91
Bottom Layer:
  text "SPECIAL THANKS TO / DR. ANN VAN HEEST / DR. JON BRAMAN" at 3580,3460 h80

## Silkscreen, mask and mechanical layers (free items; w line width, h text height)
Top Overlay:
  text "PD5" at 2460,4330 h50 r90
  text "PWR" at 2650,4320 h50 r90
  text "G" at 1360,4220 h80 r180
  text "W" at 1470,4220 h80 r180
  text "B" at 1560,4220 h80 r180
  text "R" at 1650,4220 h80 r180
  text "G" at 1760,4220 h80 r180
  text "W" at 1870,4220 h80 r180
  text "B" at 1960,4220 h80 r180
  text "R" at 2060,4220 h80 r180
  text "B" at 2160,4220 h80 r180
  text "R" at 2260,4220 h80 r180
  text "DROP" at 1545,3825 h50 r180
  text "TOOL" at 1935,3825 h50 r180
  text "PANEL" at 2260,3825 h50 r180
  text "V0.1.2" at 2970,3745 h59.06
  text "ORTHOBOXES MOTHERBOARD" at 2970,3695 h59.06
  text "ENTROPIC ADVANTAGE LLC" at 2970,3640 h59.06
  text "MATTHEW PANG CHIA HUA 2016" at 2970,3585 h59.06
  text "MATTHEW.PANG@GMAIL.COM" at 2970,3525 h59.06
  text "T : TOP | B : BOTTOM" at 2970,3440 h59.06
  text "L : LEFT  | M : MID | R : RIGHT" at 2975,3380 h59.06
  text "POK : POKEY | PEG : PEGGY" at 2975,3320 h59.06
Bottom Overlay:
  text "PAN LED-" at 2105,3405 h100 r270
  text "TH RECV-" at 1705,3400 h100 r270
  text "PAN LED+" at 2205,3385 h100 r270
  text "TH RECV+" at 1805,3380 h100 r270
  text "TH TRANS-" at 1905,3340 h100 r270
  text "DRP RECV-" at 1305,3335 h100 r270
  text "TH TRANS+" at 2005,3320 h100 r270
  text "DRP RECV+" at 1405,3315 h100 r270
  text "DRP TRANS-" at 1505,3275 h100 r270
  text "DRP TRANS+" at 1605,3255 h100 r270

## Text inside footprints (layer, text, board x,y; h text height)
D1: Top Overlay "C" at 1625,2722 h50; Top Overlay "A" at 1510,2722 h50
D2: Top Overlay "C" at 2749,4389.94 h50 r90; Top Overlay "A" at 2749,4324.94 h50 r90
D3: Top Overlay "A" at 2560,4325.94 h50 r90; Top Overlay "C" at 2560,4390.94 h50 r90